# Altium PCB PCB1.PcbDoc
Units mm, origin at the board's own origin, x right, y up, seen from the top; angles counter-clockwise.
Board outline 114.48 x 112.55 mm, 2 copper layers (Top Layer, Bottom Layer); 32 components, 49 nets, 173 pads, 0 vias.
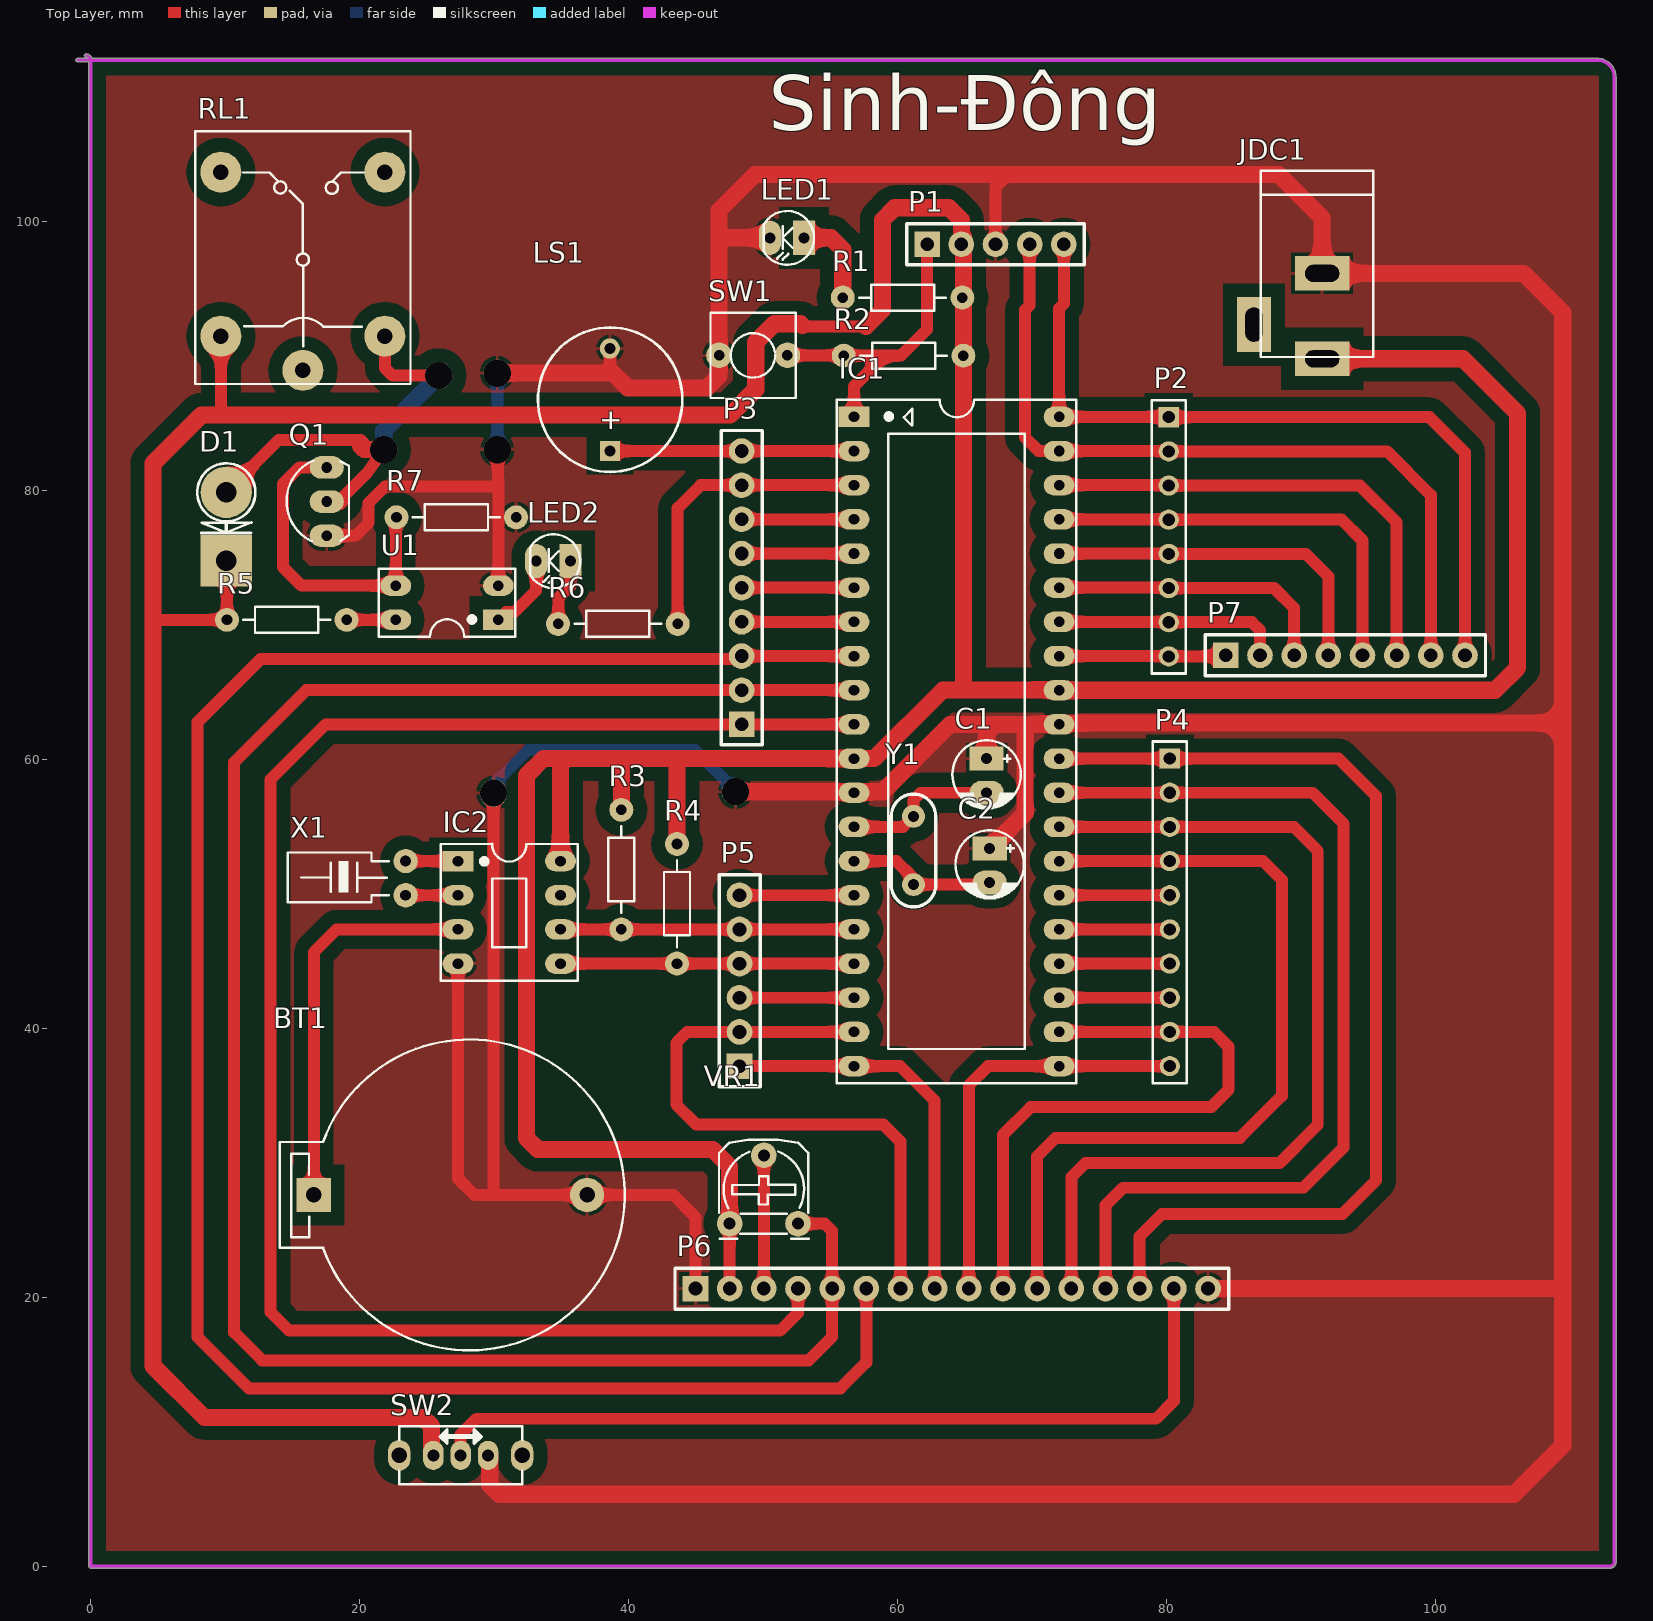
[diagram p0: Top Layer view]
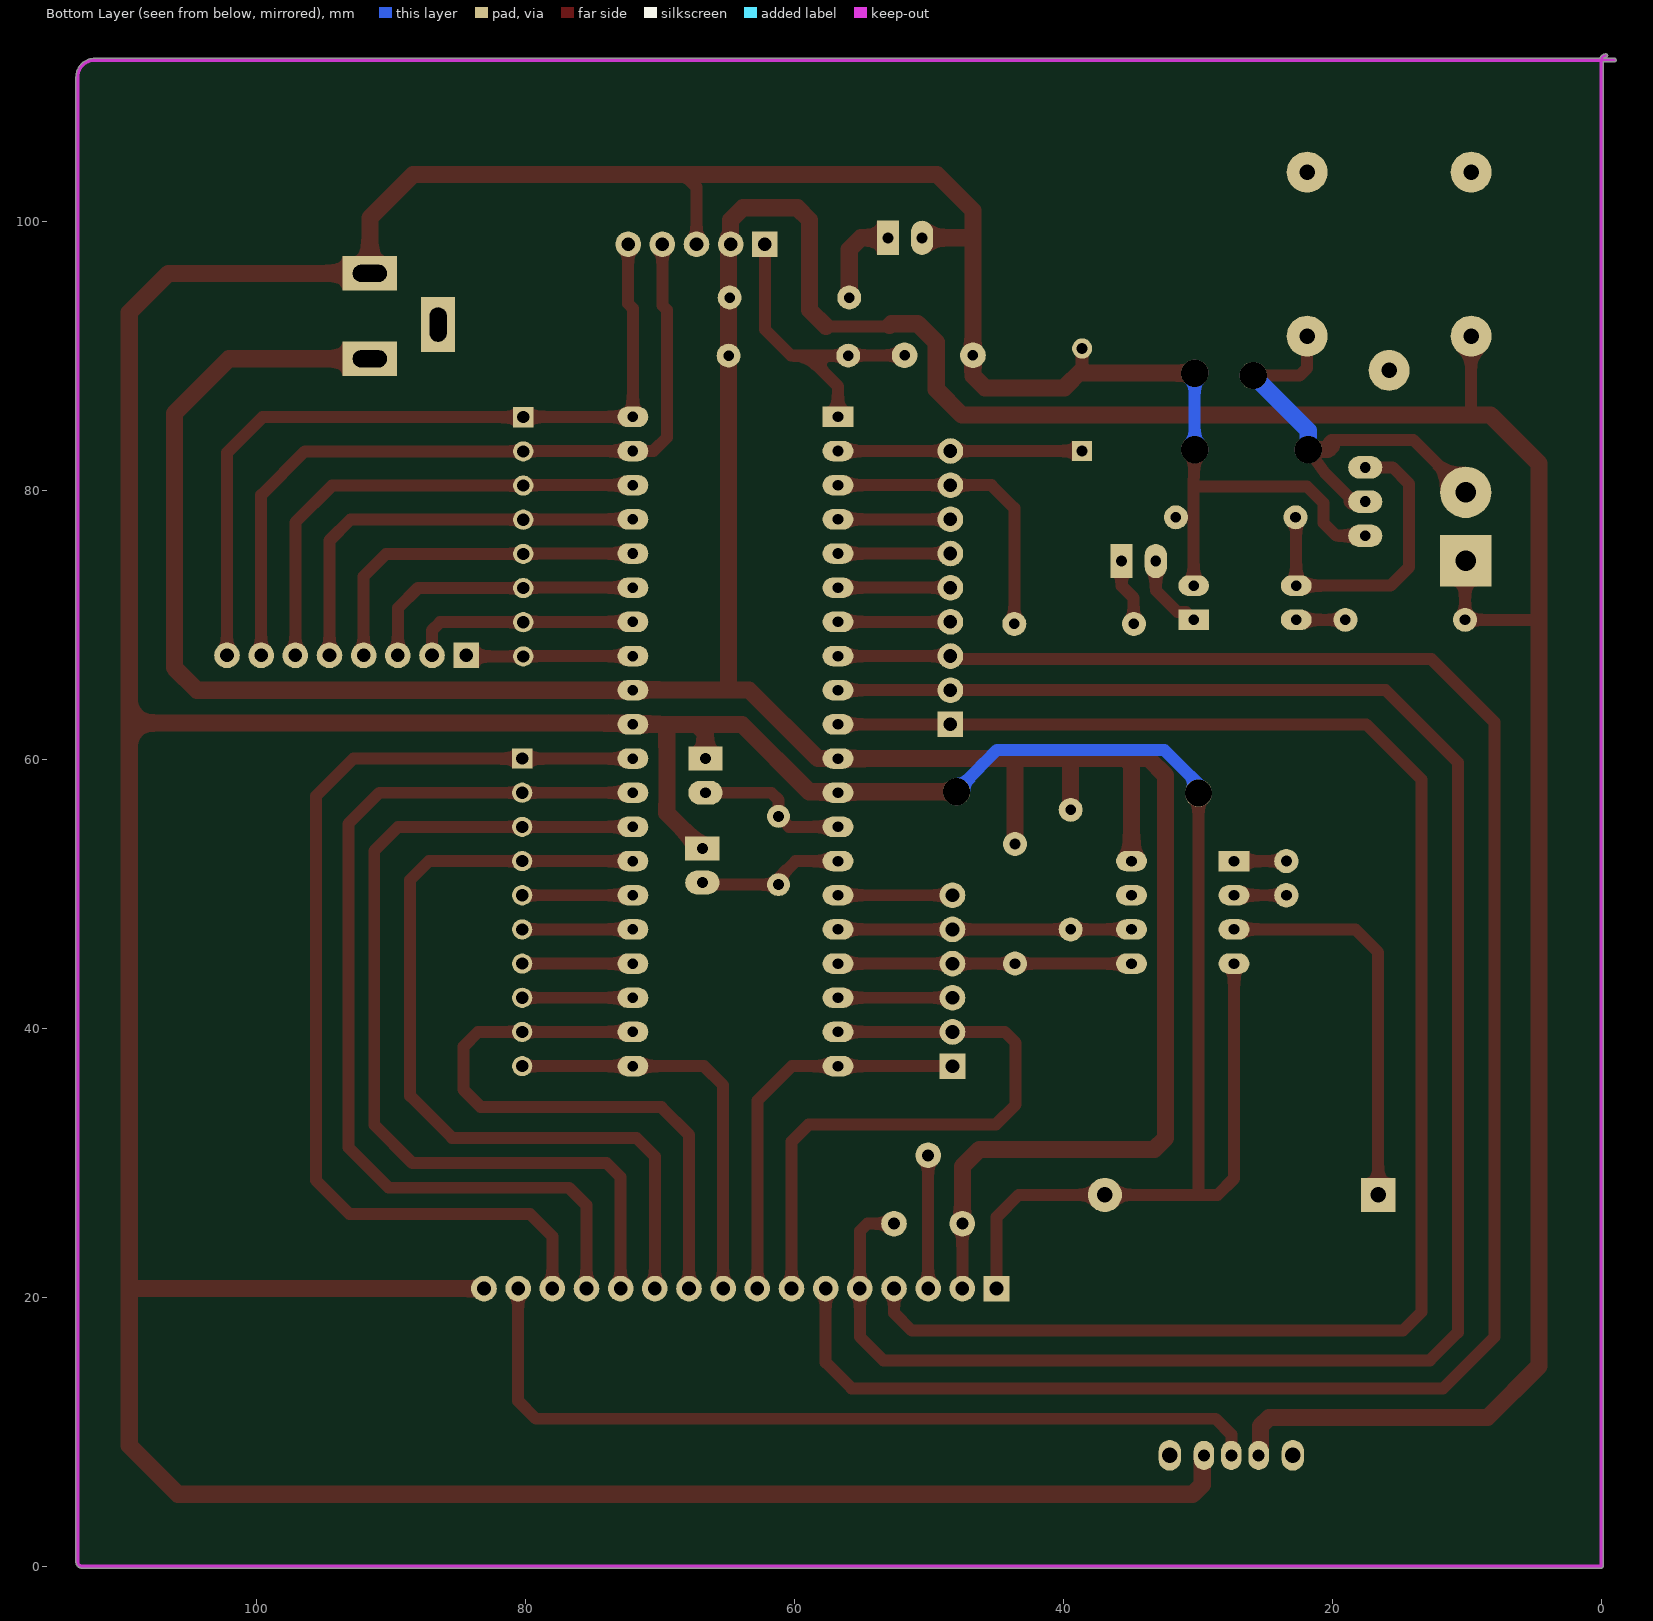
[diagram p1: Bottom Layer view, seen from below]
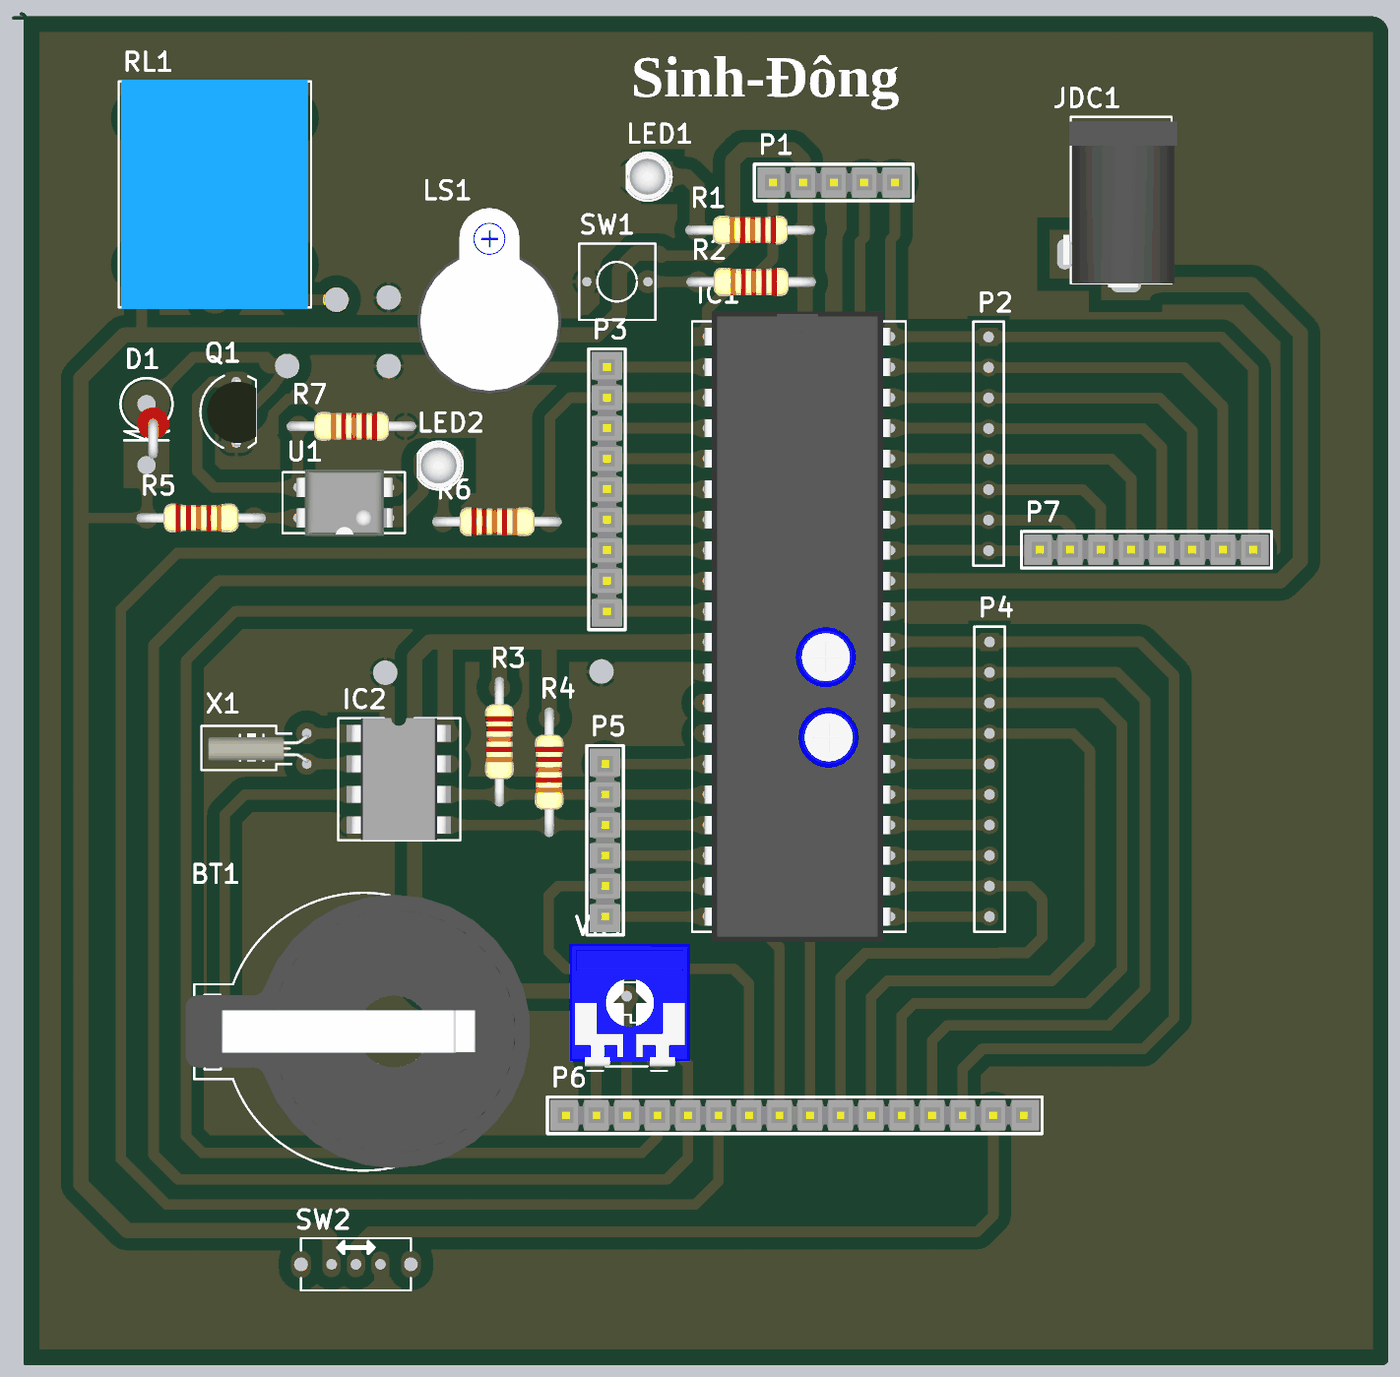
[diagram p2: 3D render of the assembled board from above, using the file's embedded part models]

## Layer stack, top to bottom
Top Solder: solder mask 0.0102, Solder Resist, Dk 3.5
Top Layer: signal copper 0.0356
Dielectric 1: dielectric 0.32, FR-4, Dk 4.8
Bottom Layer: signal copper 0.0356
Bottom Solder: solder mask 0.0102, Solder Resist, Dk 3.5

## Board outline
-0.965,111.836 cw(c-0.965,111.963) -0.965,112.091 -0.172,112.091 ccw(c-0.33,111.963) -0.33,112.166 cw(c-0.33,112.293) -0.33,112.421 cw(c-0.33,111.963) 0.109,112.091 111.989,112.091 cw(c111.989,110.693) 113.386,110.693 113.386,0.33 cw(c112.928,0.33) 112.928,-0.127 0,-0.127 cw(c0,0) -0.127,0 -0.127,111.836

## Design rules (kind name [scope] priority, off if disabled: settings)
Clearance [All] p1: gap=1.016
PolygonConnect [All] p1: connectstyle=Relief reliefconductorwidth=0.254 reliefentries=4 polygonreliefangle="90 Angle" airgapwidth=0.254
RoutingVias [All] p1: holewidth=0.711 width=1.27 viastyle="Through Hole" minholewidth=0.711 minwidth=1.27 maxholewidth=0.711 maxwidth=1.27
SolderMaskExpansion [All] p1: expansion=0.102
Width [All] p1: maxlimit=1.27 minlimit=0.508 preferedwidth=0.889
30 further rules are at their usual default settings.

## Components (designator, comment, footprint, x,y, rotation, side; value= is the part's Value field where it differs from the comment)
BT1 "PIN 3V" PIN3V 16.586,27.61 r0 top
C1 "33pF" CP1/2 66.599,60.046 r270 top
C2 "33pF" CP1/2 66.827,53.365 r270 top
D1 "Diode" D5AN 10.084,74.752 r90 top
IC1 "16F877A" DIP40/W0.6 56.744,85.446 r270 top
IC2 "DS1307" DIP8/W0.3 27.305,52.426 r270 top
JDC1 "Jac DC" DC-IN 89.002,92.939 r270 top
LED1 "LED" LED-3 53.035,98.755 r180 top
LED2 "LED" LED-3 35.662,74.727 r180 top
LS1 "SPEAKER" speaker 38.608,82.906 r90 top
P1 "Header 5" "Header 5" 62.179,98.273 r0 top
P2 "Header 8" HDR1X8 80.137,85.42 r270 top
P3 "Header 9" "Header 9" 48.387,62.586 r90 top
P4 "Header 10" HDR1X10 80.213,60.046 r270 top
P5 "Header 6" "Header 6" 48.235,37.186 r90 top
P6 "Header 16" "Header 16" 44.958,20.65 r0 top
P7 "Header 8" "Header 8" 84.379,67.716 r0 top
Q1 "C1815" QTO-92 17.551,79.146 r90 top
R1 "330" R1/4W 55.905,94.31 r0 top
R2 "10k" R1/4W 55.982,89.992 r0 top
R3 "1k" R1/4W 39.446,47.346 r90 top
R4 "1k" R1/4W 43.586,44.806 r90 top
R5 "2.2k" R1/4W 19.025,70.358 r180 top
R6 "330" R1/4W 43.637,70.053 r180 top
R7 "10k" R1/4W 22.733,77.978 r0 top
RL1 "Relay 10A/12V" RL_SPDT_10A 15.773,88.9 r90 top
SW1 "SW" SW2 46.711,90.018 r0 top
SW2 "SW102A" SW102 29.54,8.255 r180 top
U1 "PC817" DIP4/W0.3 30.302,70.358 r90 top
VR1 "10K" VR 47.498,25.476 r0 top
X1 "32,768 Khz" XT32k 23.419,49.886 r180 top
Y1 "20MHz" XTAL 61.163,53.213 r180 top

## Footprints (in the part's own frame and the unit in brackets; to place one, negate y for a bottom-side part, rotate by r counter-clockwise, add the part's x,y. Pads: shape width x height; smd on the part's side, far side on the other; paste and mask are expansions set on the pad)
CP1/2 [mil] "Tu hoa < 22uF/16>50V"
  rect 70x100 hole 32: 1(0,0)
  oval 70x100 hole 32: 2(100,0)
  silkscreen extent -53,-100 146,100, body extent -49,-99 149,99, height 287
D5AN [mil] "Diode 5A, W 200mil, L 250mil"
  round 150 hole 60: 1(200,0)
  rect 150x150 hole 60: 2(0,0)
  silkscreen extent 81,-85 285,85, body extent 21,-74 189,31, height 252
DC-IN [mil] "Jac DC input"
  rect 100x160 hole 50 slot 100 at 90 deg: 1(125,100) 2(-125,100)
  rect 160x100 hole 50 slot 100 at 0 deg: 3(25,-100)
  silkscreen extent -425,-80 120,250, body extent -410,-105 134,269, height 434
DIP4/W0.3 [mil] "4 PIN, W 300mil, Pin to pin 100mil"
  rect 60x90 hole 31: 1(0,0)
  oval 60x90 hole 31: 2(100,0) 3(100,300) 4(0,300)
  silkscreen extent -50,-50 150,350, body extent -59,-10 159,305, height 170
DIP8/W0.3 [mil] "8 PIN, W 300mil, Pin to pin 100mil"
  rect 60x90 hole 31: 1(0,0)
  oval 60x90 hole 31: 2(100,0) 3(200,0) 4(300,0) 5(300,300) 6(200,300) 7(100,300) 8(0,300)
  silkscreen extent -50,-50 350,350, body extent -50,-40 350,336, height 201
DIP40/W0.6 [mil] "40 PIN, W 600mil, Pin to pin 100mil"
  rect 60x90 hole 31: 1(0,0)
  oval 60x90 hole 31: 2(100,0) 3(200,0) 4(300,0) 5(400,0) 6(500,0) 7(600,0) 8(700,0) 9(800,0) 10(900,0) 11(1000,0) 12(1100,0) 13(1200,0) 14(1300,0) 15(1400,0) 16(1500,0) 17(1600,0) 18(1700,0) 19(1800,0) 20(1900,0) 21(1900,600) 22(1800,600) 23(1700,600) 24(1600,600) 25(1500,600) 26(1400,600) 27(1300,600) 28(1200,600) 29(1100,600) 30(1000,600) 31(900,600) 32(800,600) 33(700,600) 34(600,600) 35(500,600) 36(400,600) 37(300,600) 38(200,600) 39(100,600) 40(0,600)
  silkscreen extent -50,-50 1950,650, body extent -82,-10 1982,600, height 224
HDR1X8 [mm] "Connector; Header; 8 Position"
  rect 1.5x1.5 hole 0.9: 1(0,0)
  round 1.5 hole 0.9: 2(2.54,0) 3(5.08,0) 4(7.62,0) 5(10.16,0) 6(12.7,0) 7(15.24,0) 8(17.78,0)
  silkscreen extent -1.27,-1.27 19.05,1.27
HDR1X10 [mm] "Connector; Header; 10 Position"
  rect 1.5x1.5 hole 0.9: 1(0,0)
  round 1.5 hole 0.9: 2(2.54,0) 3(5.08,0) 4(7.62,0) 5(10.16,0) 6(12.7,0) 7(15.24,0) 8(17.78,0) 9(20.32,0) 10(22.86,0)
  silkscreen extent -1.27,-1.27 24.13,1.27
"Header 5" [mil] "Connector; Header; 5 Position; Solder Pad 35mil"
  rect 75x75 hole 40: 1(0,0)
  round 75 hole 40: 2(100,0) 3(200,0) 4(300,0) 5(400,0)
  silkscreen extent -60,-60 460,60, body extent -50,-50 450,50, height 83
"Header 6" [mil] "Connector; Header; 6 Position; Solder Pad 35mil"
  rect 75x75 hole 40: 1(0,0)
  round 75 hole 40: 2(100,0) 3(200,0) 4(300,0) 5(400,0) 6(500,0)
  silkscreen extent -60,-60 560,60, body extent -50,-50 550,50, height 330
"Header 8" [mil] "Connector; Header; 8 Position; Solder Pad 35mil"
  rect 75x75 hole 40: 1(0,0)
  round 75 hole 40: 2(100,0) 3(200,0) 4(300,0) 5(400,0) 6(500,0) 7(600,0) 8(700,0)
  silkscreen extent -60,-60 760,60, body extent -50,-50 750,50, height 330
"Header 9" [mil] "Connector; Header; 9 Position; Solder Pad 35mil"
  rect 75x75 hole 40: 1(0,0)
  round 75 hole 40: 2(100,0) 3(200,0) 4(300,0) 5(400,0) 6(500,0) 7(600,0) 8(700,0) 9(800,0)
  silkscreen extent -60,-60 860,60, body extent -50,-50 850,50, height 83
"Header 16" [mil] "Connector; Header; 16 Position; Solder Pad 35mil"
  rect 75x75 hole 40: 1(0,0)
  round 75 hole 40: 2(100,0) 3(200,0) 4(300,0) 5(400,0) 6(500,0) 7(600,0) 8(700,0) 9(800,0) 10(900,0) 11(1000,0) 12(1100,0) 13(1200,0) 14(1300,0) 15(1400,0) 16(1500,0)
  silkscreen extent -60,-60 1560,60, body extent -50,-50 1550,50, height 330
LED-3 [mil] "LED 2 PIN, 3ly Only colour"
  rect 65x100 hole 32: 1(0,0)
  oval 65x100 hole 32: 2(100,0)
  silkscreen extent -29,-78 118,79, body extent -25,-75 113,75, height 217
PIN3V [mil] "Socket PIN 3V"
  rect 100x100 hole 45: 1(0,0)
  round 100 hole 45: 2(800,0)
  silkscreen extent -100,-455 910,455, body extent -128,-447 1002,449, height 278
QTO-92 [mil] "TO-92"
  oval 66x100 hole 32: 1(-100,0) 2(0,0) 3(100,0)
  silkscreen extent -117,-65 120,118, body extent -109,-66 109,95, height 245
R1/4W [mil] "R 1/4W, 2 Pin, 350mil"
  round 70 hole 31: 1(0,0) 2(350,0)
  silkscreen extent 48,-38 302,38, body extent -40,-47 386,47, height 111
RL_SPDT_10A [mil] "Relay SPDT, 5 pin, 10A,W 650mil, L 800mil, H 800mil"
  round 120 hole 45: 1(0,0) 2(580,240) 3(580,-240) 4(100,-240) 5(100,240)
  silkscreen extent -40,-315 700,315, body extent -46,-304 706,306, height 602
speaker [mm]
  rect 1.5x1.5 hole 0.8: 1(0,0)
  round 1.5 hole 0.8: 2(7.62,0.013)
  silkscreen extent -1.55,-5.38 9.18,5.36, body extent -2.22,-6 13.24,6, height 4.5
SW2 [mil] "SW button 2pin, 250x 250 mil"
  round 75 hole 31: 1(0,0) 2(200,0)
  silkscreen extent -25,-125 225,125
SW102 [mil] "Switch 102 On Board nho"
  oval 60x85 hole 35: 1(0,0) 2(80,0) 3(160,0)
  oval 65x90 hole 45: 4(260,0) 5(-100,0)
  silkscreen extent -100,-85 260,85
VR [mil] "Resistor Variable"
  round 75 hole 35: 1(0,0) 2(100,200) 3(200,0)
  silkscreen extent -31,-44 231,246, body extent -87,-30 307,372, height 165
XT32k [mm]
  round 1.8 hole 0.813: 1(0,0) 2(0,-2.54)
  silkscreen extent 1.27,-3.17 8.76,0.51, body extent -0.15,-2.42 8.2,-0.12, height 1.95
XTAL [mil] "Crystal, Thru-Hole; 2 Leads; Body 3.1 x 8.2 mm (Dia.xH); Solder pad 35mil"
  round 67 hole 32: 1(0,100) 2(0,-100)
  silkscreen extent -65,-165 65,165, body extent -92,-223 92,223, height 139

## Part data
BT1: "Battery 3VDC"
C1 C2: library part CP1, "Cap P  0,1uF < 22uF , 16 - 50V"
D1: "Default Diode"
IC1: library part 16F877, "8K FLASH, 368B RAM, 256B EFROM"
IC2: "Real Timer Serial"
JDC1: library part DCIN, "Jac DC input"
LED1 LED2: "LED Single colour Green and Red"
P1: "Header, 5-Pin"
P2 P7: "Header, 8-Pin"
P3: "Header, 9-Pin"
P4: "Header, 10-Pin"
P5: "Header, 6-Pin"
P6: "Header, 16-Pin"
Q1: "NPN 600mW, ECB"
R1 R2 R3 R4 R5 R6 R7: library part R1/4W, "Resistor 1/4W"
RL1: library part "Relay 1", "Relay SPDT,10A - 12VDC 5 Pin"
SW1: library part SW2, "Switch button 2 pin"
SW2: "Switch 102 on Broad"
U1: "Single Opto"
VR1: library part VR, "Var Resistor"
X1: library part XT32k, "Crystal 32,768kHz for timer real"
Y1: library part XTAL_1, "Crystal Oscillator"

## Free pads (board coordinates)
  round 2.032 hole 2.032: 5(47.93,57.582) 6(29.947,57.48) 7(21.787,83.007) 8(30.226,83.007) 9(30.226,88.697) 10(25.883,88.519)

## Nets (pads, with @x,y where several pads share a name; then routed paths per layer and width w, separated by ;. In a path a pad name is that pad's centre, name@x,y a point inside that pad or via, vN(x,y) a via of type N, cw(c..) or ccw(c..) an arc to the next point about the centre after c; other vN are vias at no path point)
A0: IC1.2 LS1.1 P3.9 | length 18.1
  Top Layer w0.889: LS1.1 P3.9 IC1.2
A1: IC1.3 P3.8 R6.1 | length 22.4
  Top Layer w0.889: R6.1 43.637,78.664 45.339,80.366 P3.8 IC1.3
AK: P6.15 SW2.2 | length 63.9
  Top Layer w0.889: SW2.2 27.508,9.804 28.677,10.973 79.197,10.973 80.518,12.294 P6.15
B0: IC1.33 P2.8 P7.1 | length 12.3
  Top Layer w0.889: IC1.33 P2.8@80.112,67.666 ; P2.8 P7.1@84.303,67.64
B1: IC1.34 P2.7 P7.2 | length 17
  Top Layer w0.889: IC1.34 P2.7@80.112,70.206 ; P2.7 86.309,70.18 86.919,69.571 P7.2
B2: IC1.35 P2.6 P7.3 | length 21.6
  Top Layer w0.889: IC1.35 P2.6@80.112,72.746 ; P2.6 87.96,72.72 89.459,71.222 P7.3
B3: IC1.36 P2.5 P7.4 | length 26.6
  Top Layer w0.889: IC1.36 P2.5@80.112,75.286 ; P2.5 90.322,75.26 91.999,73.584 P7.4
B4: IC1.37 P2.4 P7.5 | length 31.7
  Top Layer w0.889: IC1.37 P2.4@80.112,77.826 ; P2.4 92.989,77.8 94.539,76.251 P7.5
B5: IC1.38 P2.3 P7.6 | length 36.1
  Top Layer w0.889: IC1.38 P2.3@80.112,80.366 ; P2.3 94.336,80.34 97.079,77.597 P7.6
B6: IC1.39 P1.4 P2.2 P7.7 | length 58.3
  Top Layer w0.889: P1.4 69.799,93.726 69.444,93.37 69.444,83.922 70.46,82.906 IC1.39 P2.2@80.112,82.906 ; P2.2 96.368,82.88 99.619,79.629 P7.7
B7: IC1.40 P1.5 P2.1 P7.8 | length 59.3
  Top Layer w0.889: P1.5 72.339,93.853 71.984,93.497 IC1.40 P2.1@80.112,85.446 ; P2.1 99.517,85.42 102.159,82.779 P7.8
C0: IC1.15 P5.6 | length 8.5
  Top Layer w0.889: P5.6 IC1.15
C1: IC1.16 IC2.6 P5.5 R3.1 | length 21.8
  Top Layer w0.889: IC2.6 R3.1 P5.5 IC1.16
C2: IC1.17 IC2.5 P5.4 R4.1 | length 21.8
  Top Layer w0.889: IC2.5 R4.1 P5.4 IC1.17
C4: IC1.23 P4.8 | length 8.2
  Top Layer w0.889: IC1.23 P4.8
D0: IC1.19 P5.2 P6.7 | length 46.9
  Top Layer w0.889: IC1.19 P5.2 44.348,39.726 43.536,38.913 43.536,34.315 45.009,32.842 58.928,32.842 60.198,31.572 P6.7
D1: IC1.20 P5.1 P6.8 | length 29.5
  Top Layer w0.889: P5.1 IC1.20 60.173,37.186 62.738,34.62 P6.8
D2: IC1.21 P4.10 P6.9 | length 30.6
  Top Layer w0.889: P6.9 65.278,35.763 66.7,37.186 IC1.21 P4.10
D3: IC1.22 P4.9 P6.10 | length 45.8
  Top Layer w0.889: P6.10 67.818,32.08 69.875,34.138 80.924,34.138 80.95,34.163 83.312,34.163 84.582,35.433 84.582,38.633 83.49,39.726 P4.9 IC1.22
D4: IC1.27 P4.4 P6.11 | length 63.1
  Top Layer w0.889: P6.11 70.358,30.48 71.73,31.852 85.42,31.852 88.544,34.976 88.544,51.029 87.147,52.426 P4.4 IC1.27
D5: IC1.28 P4.3 P6.12 | length 68.5
  Top Layer w0.889: IC1.28 P4.3 89.433,54.966 91.211,53.188 91.211,32.817 88.367,29.972 73.939,29.972 72.898,28.931 P6.12
D6: IC1.29 P4.2 P6.13 | length 71.8
  Top Layer w0.889: IC1.29 P4.2 90.83,57.506 93.142,55.194 93.142,31.14 90.145,28.143 76.733,28.143 75.438,26.848 P6.13
D7: IC1.30 P4.1 P6.14 | length 76.5
  Top Layer w0.889: IC1.30 P4.1 92.761,60.046 95.555,57.252 95.555,28.702 93.04,26.187 79.629,26.187 77.978,24.536 P6.14
E0: IC1.8 P3.3 P6.6 | length 154.1
  Top Layer w0.889: IC1.8 P3.3 48.158,67.437 12.624,67.437 7.95,62.763 7.95,17.043 11.76,13.233 55.728,13.233 57.658,15.164 P6.6
E1: IC1.9 P3.2 P6.5 VR1.3 | length 147.3
  Top Layer w0.889: VR1.3 54.559,25.476 55.118,24.917 P6.5 55.118,17.069 53.365,15.316 12.751,15.316 10.668,17.399 10.668,59.766 16.027,65.126 P3.2 IC1.9
E2: IC1.10 P3.1 P6.4 | length 126.8
  Top Layer w0.889: P6.4 52.578,18.847 51.257,17.526 14.757,17.526 13.386,18.898 13.386,58.496 17.475,62.586 P3.1 IC1.10
GND: BT1.2 C1.1 C2.1 IC1.12 IC1.31 IC2.4 JDC1.2 LED1.2 LS1.2 P1.3 P6.1 P6.16 pad.5 pad.6 pad.8 pad.9 Q1.1 R7.2 SW1.1 SW2.1 U1.2 | length 504.9
  Top Layer w0.889: Q1.1 19.698,76.606 20.637,77.546 20.637,79.036 21.865,80.264 30.201,80.264 30.302,80.162 ; IC2.4@27.93,44.806 IC2.4 27.305,28.829 28.524,27.61 29.87,27.61 ; pad.6 29.947,27.686 29.87,27.61 ; pad.8 30.302,80.162 ; U1.2 30.302,80.162 ; 38.595,88.925 LS1.2 ; P6.1 44.958,25.959 43.307,27.61 BT1.2 29.87,27.61 ; P1.3 67.259,102.54 68.174,103.454
  Top Layer w1.27: SW2.1@29.667,8.255 29.667,6.071 30.378,5.359 105.791,5.359 109.423,8.992 109.423,20.498 ; pad.9 38.532,88.697 38.595,88.76 38.595,88.925 39.916,87.605 45.822,87.605 46.711,88.494 SW1.1 46.711,96.012 46.711,98.908 ; pad.5 58.877,57.582 63.881,62.586 IC1.31 72.085,62.687 109.423,62.687 ; LED1.2 46.863,98.755 46.711,98.908 ; C1.1 66.599,61.925 67.158,62.484 ; C2.1 69.469,56.007 69.469,56.586 69.444,56.611 69.444,60.965 69.469,60.991 69.469,62.484 ; P6.16 109.271,20.65 109.423,20.498 ; 46.711,98.908 46.711,100.787 49.378,103.454 68.174,103.454 88.316,103.454 91.542,100.228 JDC1.2 106.502,96.114 109.423,93.193 109.423,62.687 ; 109.423,20.498 109.423,62.687
  Bottom Layer w0.889: pad.6 29.947,58.141 32.487,60.681 44.933,60.681 45.847,59.766 pad.5 ; pad.8 pad.9
NetBT1_1: BT1.1 IC2.3 | length 29.5
  Top Layer w0.889: BT1.1 16.586,45.644 18.288,47.346 IC2.3
NetD1_1: D1.1 pad.7 pad.10 Q1.2 RL1.4 | length 33.7
  Top Layer w0.889: D1.1 13.983,83.731 20.066,83.731 20.288,83.509 ; Q1.2@18.413,79.146 20.599,81.333 pad.7 ; RL1.4 21.869,89.078 22.428,88.519 pad.10
  Top Layer w1.27: Q1.2 18.413,79.146 18.491,79.146 Q1.2@18.542,79.197 ; 20.066,83.287 20.345,83.007 pad.7
  Bottom Layer w1.27: pad.7 21.787,84.423 pad.10
NetIC1_4: IC1.4 P3.7 | length 8.4
  Top Layer w0.889: P3.7 IC1.4
NetIC1_5: IC1.5 P3.6 | length 8.4
  Top Layer w0.889: P3.6 IC1.5
NetIC1_6: IC1.6 P3.5 | length 8.4
  Top Layer w0.889: P3.5 IC1.6
NetIC1_7: IC1.7 P3.4 | length 8.4
  Top Layer w0.889: P3.4 IC1.7
NetIC1_18: IC1.18 P5.3 | length 8.5
  Top Layer w0.889: P5.3 IC1.18
NetIC1_24: IC1.24 P4.7 | length 8.2
  Top Layer w0.889: IC1.24 P4.7
NetIC1_25: IC1.25 P4.6 | length 8.2
  Top Layer w0.889: IC1.25 P4.6
NetIC1_26: IC1.26 P4.5 | length 8.2
  Top Layer w0.889: IC1.26 P4.5
NetIC2_1: IC2.1 X1.2 | length 3.9
  Top Layer w0.889: X1.2 IC2.1
NetIC2_2: IC2.2 X1.1 | length 3.9
  Top Layer w0.889: X1.1 IC2.2
NetLED1_1: LED1.1 R1.1 | length 6.8
  Top Layer w1.27: LED1.1 55.042,98.755 55.905,97.892 R1.1
NetLED2_1: LED2.1 R6.2 | length 5.1
  Top Layer w0.889: R6.2 34.773,70.079 34.773,71.984 35.662,72.873 LED2.1
NetLED2_2: LED2.2 U1.1 | length 5.9
  Top Layer w0.889: U1.1 30.874,70.929 31.499,70.929 33.122,72.553 LED2.2
NetP6_3: P6.3 VR1.2 | length 9.9
  Top Layer w0.889: P6.3 VR1.2
NetQ1_3: Q1.3 R7.1 U1.3 | length 23.9
  Top Layer w0.889: Q1.3 15.519,81.686 14.3,80.467 14.3,74.27 15.672,72.898 U1.3 R7.1@22.682,77.927
NetR5_1: R5.1 U1.4 | length 3.7
  Top Layer w0.889: R5.1 U1.4
OSC1: C1.2 IC1.13 Y1.2 | length 11.6
  Top Layer w0.889: IC1.13 60.376,54.966 Y1.2 61.163,56.972 61.697,57.506 C1.2
OSC2: C2.2 IC1.14 Y1.1 | length 10.7
  Top Layer w0.889: IC1.14 59.893,52.426 Y1.1@61.163,51.156 ; Y1.1 66.675,50.673 C2.2
RST: IC1.1 P1.1 R2.1 SW1.2 | length 23
  Top Layer w0.889: SW1.2 55.956,90.018 R2.1 59.03,89.992 ; IC1.1 56.744,87.706 59.03,89.992 ; P1.1 62.179,91.948 60.223,89.992 59.03,89.992
VCC: D1.2 IC1.11 IC1.32 IC2.8 JDC1.1 P1.2 P6.2 R1.2 R2.2 R3.2 R4.2 R5.2 RL1.5 SW2.3 VR1.1 | length 401.8
  Top Layer w0.889: 4.623,70.409 4.674,70.358 R5.2 D1.2@10.135,74.701 ; 9.627,85.573 9.677,85.623 RL1.5 ; 39.446,59.919 39.573,60.046 ; 43.586,59.995 43.637,60.046 ; P6.2 VR1.1 ; 50.627,92.177 57.633,92.177
  Top Layer w1.27: SW2.3@25.349,8.255 25.349,10.414 24.689,11.074 8.458,11.074 4.623,14.91 4.623,70.409 4.623,81.966 8.23,85.573 9.627,85.573 47.523,85.573 49.441,87.49 49.441,90.991 50.627,92.177 50.817,92.367 52.764,92.367 52.906,92.225 ; IC2.8 34.925,59.588 35.382,60.046 ; R3.2 39.446,59.919 ; R4.2 43.586,59.995 ; VR1.1 47.498,29.718 46.215,31.001 33.236,31.001 32.385,31.852 32.385,58.776 33.655,60.046 35.382,60.046 ; 57.633,92.177 58.852,93.396 58.852,100.076 59.766,100.99 63.805,100.99 64.719,100.076 P1.2@64.719,98.984 ; P1.2 P1.2@64.719,98.984 ; 64.872,65.532 R2.2 64.872,98.831 P1.2@64.719,98.984 ; JDC1.1 102.006,89.764 106.07,85.7 106.07,66.802 104.394,65.126 IC1.32 71.958,65.151 63.348,65.151 58.242,60.046 IC1.11 43.637,60.046 39.573,60.046 35.382,60.046
pads on no net: IC2.7 JDC1.3 RL1.1 RL1.2 RL1.3 SW2.4 SW2.5

## Polygon pours and split planes (outlines as drawn)
GND on Top Layer "Top Layer-No Net" (solid, remove dead copper, pour order 2): 0,111.963 1.168,110.795 113.513,110.795 113.513,0.584 113.259,0.33 112.928,0 0,0

## Keep-outs
Keep-Out Layer:
  lines w0.254: -0.965,111.963 111.989,111.963 cw(c111.989,110.693) 113.259,110.693 113.259,0.33 cw(c112.928,0.33) 112.928,0 0,0 0,111.963 ccw(c-0.33,111.963) -0.33,112.293

## Silkscreen, mask and mechanical layers (free items; w line width, h text height)
Top Overlay:
  text "Sinh-Đông" at 50.394,105.41 h7

## Text inside footprints (layer, text, board x,y; h text height)
LS1: Top Overlay "+" at 39.319,84.315 h1.52 r90